# EAGLE board RGB-driver-v1 (EAGLE 7.1.0)
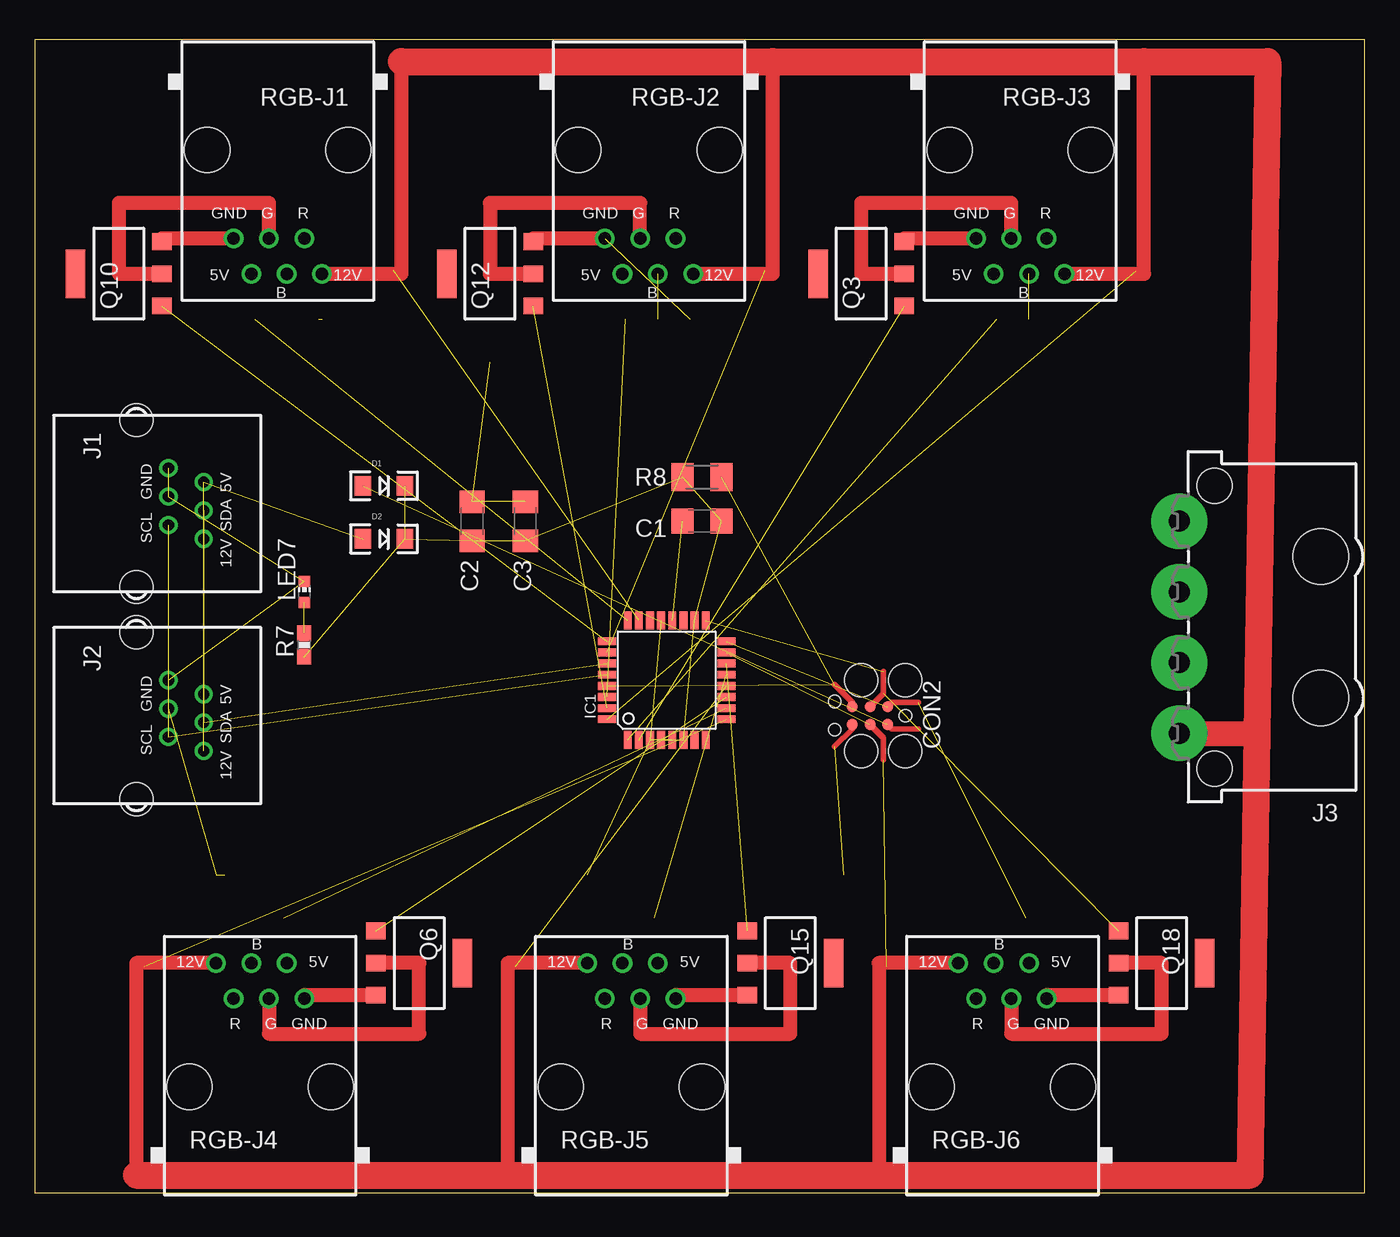
[diagram p0: board, top side]
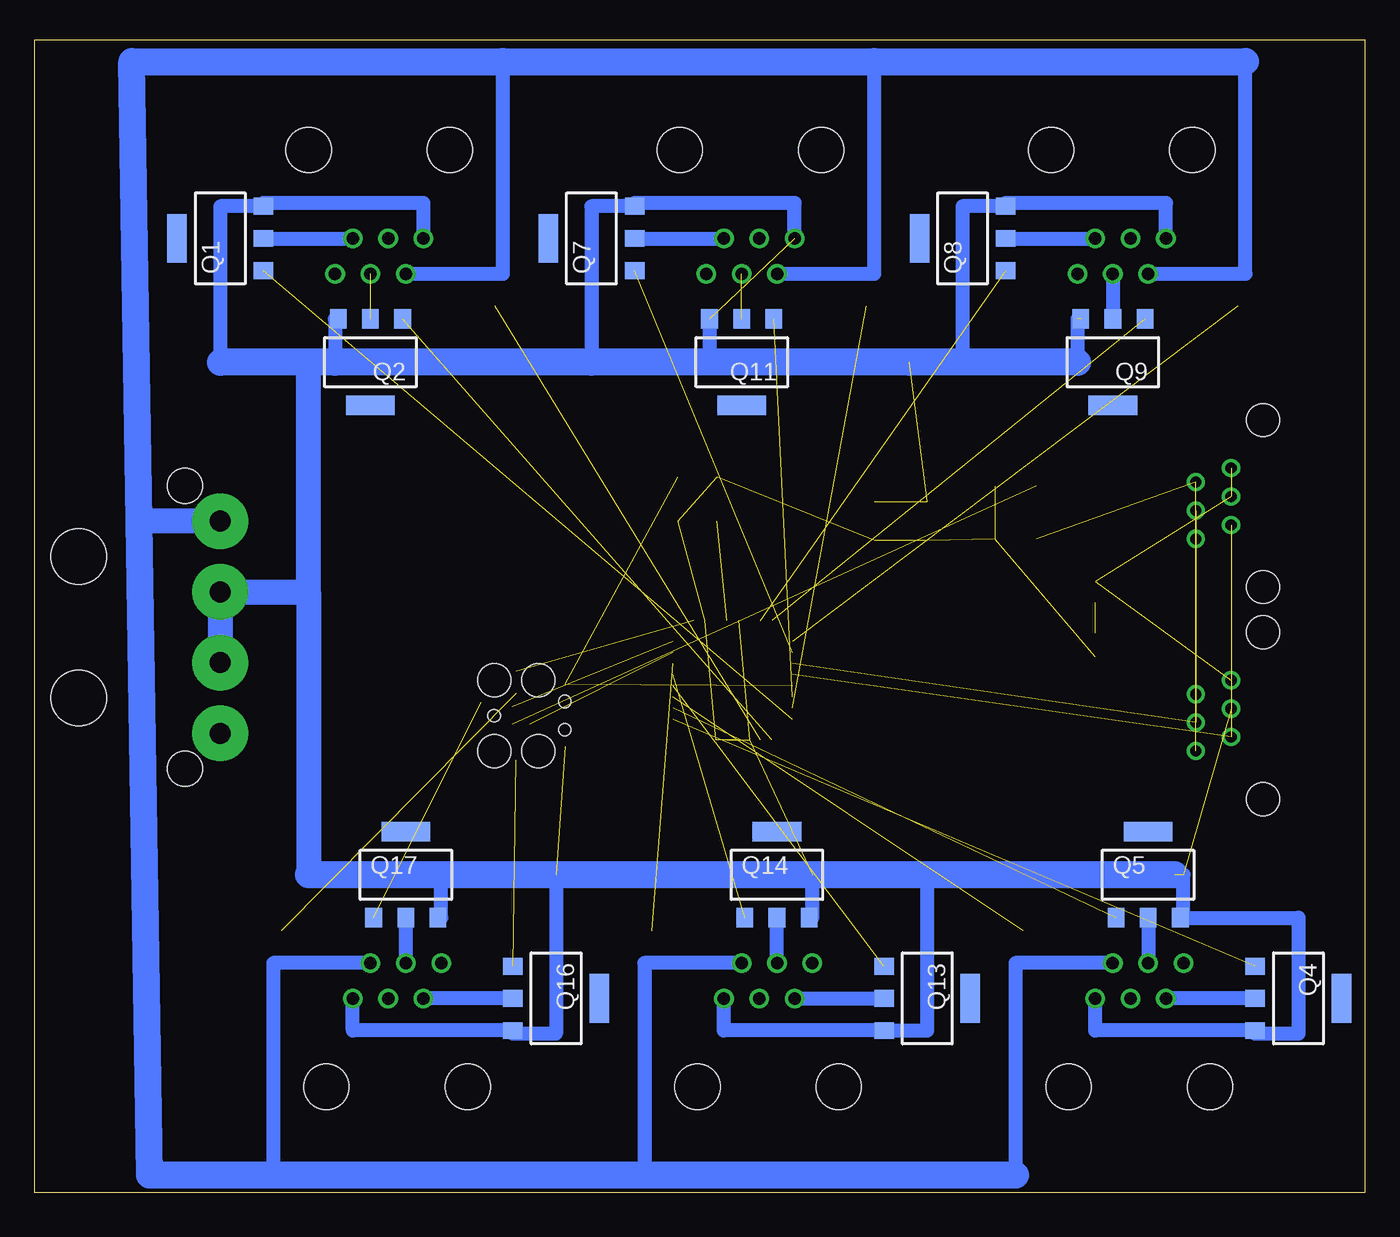
[diagram p1: board, bottom side, seen from below]

Size 95.56 x 82.86 mm. Coordinates in mm from the lower left corner, seen from the top.
Outline: 0,0 95.56,0 95.56,82.86 0,82.86 0,0
Copper layers (1*16): Top 0.035mm / dielectric 1.5mm / Bottom 0.035mm
Design rules "default": minimum track width 6mil, minimum drill 12mil, track to track 6mil, track to pad 6mil, pad to pad 6mil, via to via 6mil, smd to smd 0mil, copper to edge 10mil, drill to drill 10mil, minimum pad ring 10mil, minimum via ring 6mil, stop-mask expansion 2mil, vias tented up to drill 100mil, thermal gap 10mil
Net classes: 0 default: width 0.406 mm; 1 power: width 0.457 mm; 2 i2c: width 0.457 mm; 3 fine: width 0.305 mm; 4 aref: width 0.406 mm
vRestrict: area 39.1,30.5 to 51.8,34.3; area 39.1,39.4 to 51.8,43.2; area 47.9,30.5 to 51.8,43.2; area 39.1,30.5 to 42.9,43.2; area 56.8,31.8 to 61.9,36.8

## Footprints (pad centres in the part's own frame; a part is rotated, then mirrored left to right if it is on the bottom)
C1206 = smd 1.6 x 1.8: 1 -1.4,0; 2 1.4,0
TC2030-MCP = smd 0.787 x 0.787: 5V 1.27,0.635; GND 3.81,0.635; MISO 1.27,-0.635; MOSI 2.54,0.635; RESET 3.81,-0.635; SCK 2.54,-0.635 | hole 0.889: 0,0; 5.08,-1.016; 5.08,1.016 | hole 2.375: 0,2.54; 0,-2.54; 3.175,-2.54; 3.175,2.54
LED-1206 = smd 1.2 x 1.4: A -1.5,0; C 1.5,0
TQFP32-08 = smd 1.27 x 0.559: 1 -4.293,2.8; 2 -4.293,2; 3 -4.293,1.2; 4 -4.293,0.4; 5 -4.293,-0.4; 6 -4.293,-1.2; 7 -4.293,-2; 8 -4.293,-2.8; 17 4.293,-2.8; 18 4.293,-2; 19 4.293,-1.2; 20 4.293,-0.4; 21 4.293,0.4; 22 4.293,1.2; 23 4.293,2; 24 4.293,2.8 | smd 0.559 x 1.27: 9 -2.8,-4.293; 10 -2,-4.293; 11 -1.2,-4.293; 12 -0.4,-4.293; 13 0.4,-4.293; 14 1.2,-4.293; 15 2,-4.293; 16 2.8,-4.293; 25 2.8,4.293; 26 2,4.293; 27 1.2,4.293; 28 0.4,4.293; 29 -0.4,4.293; 30 -1.2,4.293; 31 -2,4.293; 32 -2.8,4.293
RJ12-RIGHTANGLE-I2C = drill 0.8 pad 1.3: +5V -1.54,4.84; +12V 2.54,4.84; GND1 -2.54,2.3; GND2 -0.5,2.3; SCL 1.54,2.3; SDA 0.5,4.84 | hole 2.36: -6,0; 6,0
827001 = drill 1.5 pad 4: 1 -7.62,0; 2 -2.54,0; 3 2.54,0; 4 7.62,0 | hole 4: 5.08,-10.16; -5.08,-10.16 | hole 2.5: 10.16,-2.54; -10.16,-2.54
CHIP-LED0603 = smd 0.8 x 0.8: A 0,-0.75; C 0,0.75
PG-SOT-223 = smd 1.2 x 1.4: 1 -2.311,-3.099; 2 0,-3.099; 3 2.311,-3.099 | smd 3.5 x 1.4: 4 0,3.099
0603-RES = smd 1.1 x 1: 1 -0.85,0; 2 0.85,0
M1206 = smd 1.6 x 2: 1 -1.4,0; 2 1.4,0
RJ12-STRAIGHT-RGB = drill 0.9 pad 1.4: +5V 1.905,8.89; +12V -3.175,8.89; B -0.635,8.89; G 0.635,6.35; GND1 3.175,6.35; R -1.905,6.35 | hole 3.251: -5.08,0; 5.08,0

## Placement (x,y rotation side)
C1  0.1uF  [C1206]  47.94,48.26 180 top
C2  0.1uF  [C1206]  31.43,48.26 90 top
C3  10uF  [C1206]  35.24,48.26 90 top
CON2  [TC2030-MCP]  62.55,34.29 180 top
D1  1N581D1206  [LED-1206]  25.08,50.8 0 top
D2  1N581D1206  [LED-1206]  25.08,46.99 0 top
IC1  MEGA8-AI  [TQFP32-08]  45.4,36.83 90 top
J1  RJ12RIGHTANGLE-I2C  [RJ12-RIGHTANGLE-I2C]  7.3,49.53 270 top
J2  RJ12RIGHTANGLE-I2C  [RJ12-RIGHTANGLE-I2C]  7.3,34.29 270 top
J3  [827001]  82.23,40.64 90 top
LED7  [CHIP-LED0603]  19.37,43.18 0 top
Q1  BSP75  [PG-SOT-223]  82.23,68.58 90 bottom
Q2  BSP75  [PG-SOT-223]  71.44,59.69 180 bottom
Q3  BSP75  [PG-SOT-223]  59.37,66.04 90 top
Q4  BSP75  [PG-SOT-223]  4.76,13.97 270 bottom
Q5  BSP75  [PG-SOT-223]  15.56,22.86 0 bottom
Q6  BSP75  [PG-SOT-223]  27.62,16.51 270 top
Q7  BSP75  [PG-SOT-223]  55.56,68.58 90 bottom
Q8  BSP75  [PG-SOT-223]  28.89,68.58 90 bottom
Q9  BSP75  [PG-SOT-223]  18.1,59.69 180 bottom
Q10  BSP75  [PG-SOT-223]  6.03,66.04 90 top
Q11  BSP75  [PG-SOT-223]  44.77,59.69 180 bottom
Q12  BSP75  [PG-SOT-223]  32.7,66.04 90 top
Q13  BSP75  [PG-SOT-223]  31.43,13.97 270 bottom
Q14  BSP75  [PG-SOT-223]  42.23,22.86 0 bottom
Q15  BSP75  [PG-SOT-223]  54.29,16.51 270 top
Q16  BSP75  [PG-SOT-223]  58.1,13.97 270 bottom
Q17  BSP75  [PG-SOT-223]  68.9,22.86 0 bottom
Q18  BSP75  [PG-SOT-223]  80.96,16.51 270 top
R7  10k  [0603-RES]  19.37,39.37 90 top
R8  10k  [M1206]  47.94,51.44 180 top
RGB-J1  RJ12  [RJ12-STRAIGHT-RGB]  17.46,74.93 180 top
RGB-J2  RJ12  [RJ12-STRAIGHT-RGB]  44.13,74.93 180 top
RGB-J3  RJ12  [RJ12-STRAIGHT-RGB]  70.8,74.93 180 top
RGB-J4  RJ12  [RJ12-STRAIGHT-RGB]  16.19,7.62 0 top
RGB-J5  RJ12  [RJ12-STRAIGHT-RGB]  42.86,7.62 0 top
RGB-J6  RJ12  [RJ12-STRAIGHT-RGB]  69.53,7.62 0 top

## Library data of the parts
C1-C3 R8 = resistor
CON2 D1 D2 J1 J2 RGB-J1-RGB-J6 = lpatiny
IC1 = atmel; MPN: ATMEGA8-16AU; OC_FARNELL: 9171371; OC_NEWARK: 73M8863
J3 = con-amp
LED7 = adafruit
Q1-Q18 = infineon; OC_FARNELL: unknown; OC_NEWARK: unknown
R7 = SparkFun

## Nets
5V_A [i2c]: CON2.5V D1.A
5V_B [power]: D2.A J1.+5V J2.+5V
+5V [power]: C1.1 C2.1 C3.1 D1.C D2.C IC1.4 IC1.6 IC1.18 R7.1 R8.2
+5V_HP [power]: J3.4 RGB-J1.+5V RGB-J2.+5V RGB-J3.+5V RGB-J4.+5V RGB-J5.+5V RGB-J6.+5V
+12V_HP [power]: J3.1 RGB-J1.+12V RGB-J2.+12V RGB-J3.+12V RGB-J4.+12V RGB-J5.+12V RGB-J6.+12V
A0: IC1.23 Q8.1
A1: IC1.24 Q9.1
A2: IC1.25 Q10.1
A3: IC1.26 Q7.1
A6: IC1.19
A7: IC1.22
D0: IC1.30 Q11.1
D1: IC1.31 Q12.1
D2: IC1.32 Q1.1
D3: IC1.1 Q2.1
D4: IC1.2 Q3.1
D5: IC1.9 Q4.1
D6: IC1.10 Q5.1
D7: IC1.11 Q6.1
D8: IC1.12 Q13.1
D9: IC1.13 Q14.1
D10: IC1.14 Q15.1
GND [power]: C2.2 C3.2 CON2.GND IC1.3 IC1.5 IC1.21 J1.GND1 J1.GND2 J2.GND1 J2.GND2 J3.2 J3.3 LED7.C Q1.3 Q2.3 Q3.3 Q4.3 Q5.3 Q6.3 Q7.3 Q8.3 Q9.3 Q10.3 Q11.3 Q12.3 Q13.3 Q14.3 Q15.3 Q16.3 Q17.3 Q18.3 RGB-J1.GND1 RGB-J2.GND1 RGB-J3.GND1 RGB-J4.GND1 RGB-J5.GND1 RGB-J6.GND1
MISO: CON2.MISO IC1.16 Q17.1
MOSI: CON2.MOSI IC1.15 Q16.1
N$1: Q2.2 RGB-J3.B
N$2 [aref]: Q1.2 RGB-J3.R
N$3 [aref]: Q3.2 RGB-J3.G
N$4: C1.2 IC1.20
N$5 [aref]: Q5.2 RGB-J4.B
N$6 [aref]: Q10.2 RGB-J1.G
N$7 [aref]: Q4.2 RGB-J4.R
N$8 [aref]: Q6.2 RGB-J4.G
N$9 [aref]: Q14.2 RGB-J5.B
N$10: Q11.2 RGB-J2.B
N$11 [aref]: Q13.2 RGB-J5.R
N$12 [aref]: Q15.2 RGB-J5.G
N$13: J1.+12V J2.+12V
N$14 [aref]: Q17.2 RGB-J6.B
N$15: LED7.A R7.2
N$16 [aref]: Q16.2 RGB-J6.R
N$17 [aref]: Q18.2 RGB-J6.G
N$20 [aref]: Q7.2 RGB-J2.R
N$23 [aref]: Q12.2 RGB-J2.G
N$50 [aref]: Q9.2 RGB-J1.B
N$68 [aref]: Q8.2 RGB-J1.R
PB6: IC1.7
PB7: IC1.8
RESET: CON2.RESET IC1.29 R8.1
SCK: CON2.SCK IC1.17 Q18.1
SCL [i2c]: IC1.28 J1.SCL J2.SCL
SDA [i2c]: IC1.27 J1.SDA J2.SDA

## Tracks (layer width: path | path; a pad name or v marks a point on that pad's centre or on a via)
5V_A  (1 unrouted)
  Top 0.406: CON2.5V 61.59,33.34 63.5,33.34
5V_B  (2 unrouted)
+5V  (9 unrouted)
+5V_HP
  Bottom 1.016: RGB-J1.+5V 8.57,66.04 8.57,81.28 | RGB-J2.+5V 35.24,66.04 35.24,81.28 | RGB-J3.+5V 61.91,66.04 61.91,81.28 | RGB-J6.+5V 78.42,16.51 78.42,1.27 | RGB-J5.+5V 51.75,16.51 51.75,1.27 | RGB-J4.+5V 25.08,16.51 25.08,1.27
  Bottom 1.778: J3.4 88.06,48.26 88.06,48.25
  Bottom 1.93: 25.08,1.27 51.75,1.27 78.42,1.27 87.31,1.27 88.06,48.25 88.58,81.28 61.91,81.28 35.24,81.28 8.57,81.28
+12V_HP
  Top 1.016: RGB-J1.+12V 26.35,66.04 26.35,81.28 | RGB-J2.+12V 53.02,66.04 53.02,81.28 | RGB-J3.+12V 79.69,66.04 79.69,81.28 | RGB-J4.+12V 7.3,16.51 7.3,1.27 | RGB-J5.+12V 33.97,16.51 33.97,1.27 | RGB-J6.+12V 60.64,16.51 60.64,1.27
  Top 1.778: J3.1 87.82,33.02 87.82,33.01
  Top 1.93: 26.35,81.28 53.02,81.28 79.69,81.28 88.58,81.28 87.82,33.01 87.31,1.27 60.64,1.27 33.97,1.27 7.3,1.27
A0  (1 unrouted)
A1  (1 unrouted)
A2  (1 unrouted)
A3  (1 unrouted)
D0  (1 unrouted)
D1  (1 unrouted)
D2  (1 unrouted)
D3  (1 unrouted)
D4  (1 unrouted)
D5  (1 unrouted)
D6  (1 unrouted)
D7  (1 unrouted)
D8  (1 unrouted)
D9  (1 unrouted)
D10  (1 unrouted)
GND  (14 unrouted)
  Top 0.406: CON2.GND 58.74,33.34 57.47,32.07
  Top 1.016: Q15.3 46.04,14.2 RGB-J5.GND1 | RGB-J1.GND1 9.13,68.58 Q10.3 | RGB-J2.GND1 35.8,68.58 Q12.3 | RGB-J3.GND1 62.47,68.58 Q3.3 | Q6.3 19.37,14.2 RGB-J4.GND1 | Q18.3 72.71,14.2 RGB-J6.GND1
  Bottom 1.016: RGB-J5.GND1 46.04,11.66 Q13.3 31.43,11.66 31.43,22.86 | RGB-J4.GND1 19.37,11.66 Q4.3 7.86,11.43 4.76,11.43 4.76,19.76 Q5.3 13.02,19.76 13.02,22.86 | RGB-J6.GND1 72.71,11.66 Q16.3 61.2,11.43 58.1,11.43 58.1,22.86 | RGB-J1.GND1 14.29,71.12 25.79,71.12 Q8.3 28.89,70.89 28.89,59.69 32.7,59.69 | 46.67,59.69 47.08,60.1 Q11.3 | Q2.3 73.98,62.79 73.98,59.69 | 82.23,59.69 82.23,70.89 Q1.3 79.13,71.12 67.63,71.12 RGB-J3.GND1 | 55.56,59.69 55.56,70.89 Q7.3 52.46,71.12 40.96,71.12 RGB-J2.GND1 | Q14.3 39.69,19.76 39.69,22.86 | Q17.3 66.36,19.76 66.36,22.86 | 20.64,62.79 20.64,59.69
  Bottom 1.778: J3.2 J3.3 75.88,43.18 | 75.88,43.18 75.88,22.86 66.99,22.86 | 75.88,43.18 75.88,59.69
  Bottom 1.93: 20.64,59.69 32.7,59.69 55.56,59.69 73.98,59.69 75.88,59.69 82.23,59.69 | 13.65,22.86 31.43,22.86 39.69,22.86 58.1,22.86 66.36,22.86 75.88,22.86
MISO  (2 unrouted)
  Top 0.406: CON2.MISO 61.59,35.24 63.5,35.24
MOSI  (2 unrouted)
  Top 0.406: CON2.MOSI 60.96,32.7 60.96,31.11
N$1  (1 unrouted)
N$2
  Bottom 1.016: Q1.2 RGB-J3.R
N$3
  Top 1.016: RGB-J3.G 70.17,71.12 59.37,71.12 59.37,66.04 Q3.2
N$4  (1 unrouted)
N$5
  Bottom 1.016: Q5.2 RGB-J4.B
N$6
  Top 1.016: RGB-J1.G 16.83,71.12 6.03,71.12 6.03,66.04 Q10.2
N$7
  Bottom 1.016: Q4.2 RGB-J4.R
N$8
  Top 1.016: RGB-J4.G 16.83,11.43 27.62,11.43 27.62,16.51 Q6.2
N$9
  Bottom 1.016: RGB-J5.B Q14.2
N$10  (1 unrouted)
N$11
  Bottom 1.016: RGB-J5.R Q13.2
N$12
  Top 1.016: RGB-J5.G 43.5,11.43 54.29,11.43 54.29,16.51 Q15.2
N$13  (1 unrouted)
N$14
  Bottom 1.016: Q17.2 RGB-J6.B
N$15  (1 unrouted)
N$16
  Bottom 1.016: Q16.2 RGB-J6.R
N$17
  Top 1.016: RGB-J6.G 70.17,11.43 80.96,11.43 80.96,16.51 Q18.2
N$20
  Bottom 1.016: Q7.2 RGB-J2.R
N$23
  Top 1.016: RGB-J2.G 43.5,71.12 32.7,71.12 32.7,66.04 Q12.2
N$50
  Bottom 1.016: RGB-J1.B Q9.2
N$68
  Bottom 1.016: Q8.2 RGB-J1.R
RESET  (2 unrouted)
  Top 0.406: CON2.RESET 58.74,35.24 57.47,36.51
SCK  (2 unrouted)
  Top 0.406: CON2.SCK 60.96,35.88 60.96,37.47
SCL  (2 unrouted)
SDA  (2 unrouted)